# Altium PCB lps_display_rev_10.PcbDoc (part 3 of 3)
Units mil, origin at the board's own origin, x right, y up, seen from the top; angles counter-clockwise.
Board outline 5360 x 2470 mil, 2 copper layers (Top Layer, Bottom Layer), stack 6.2 mil thick; 137 components, 84 nets, 474 pads, 135 vias.
Unrouted connection lines stored in the file: 10.
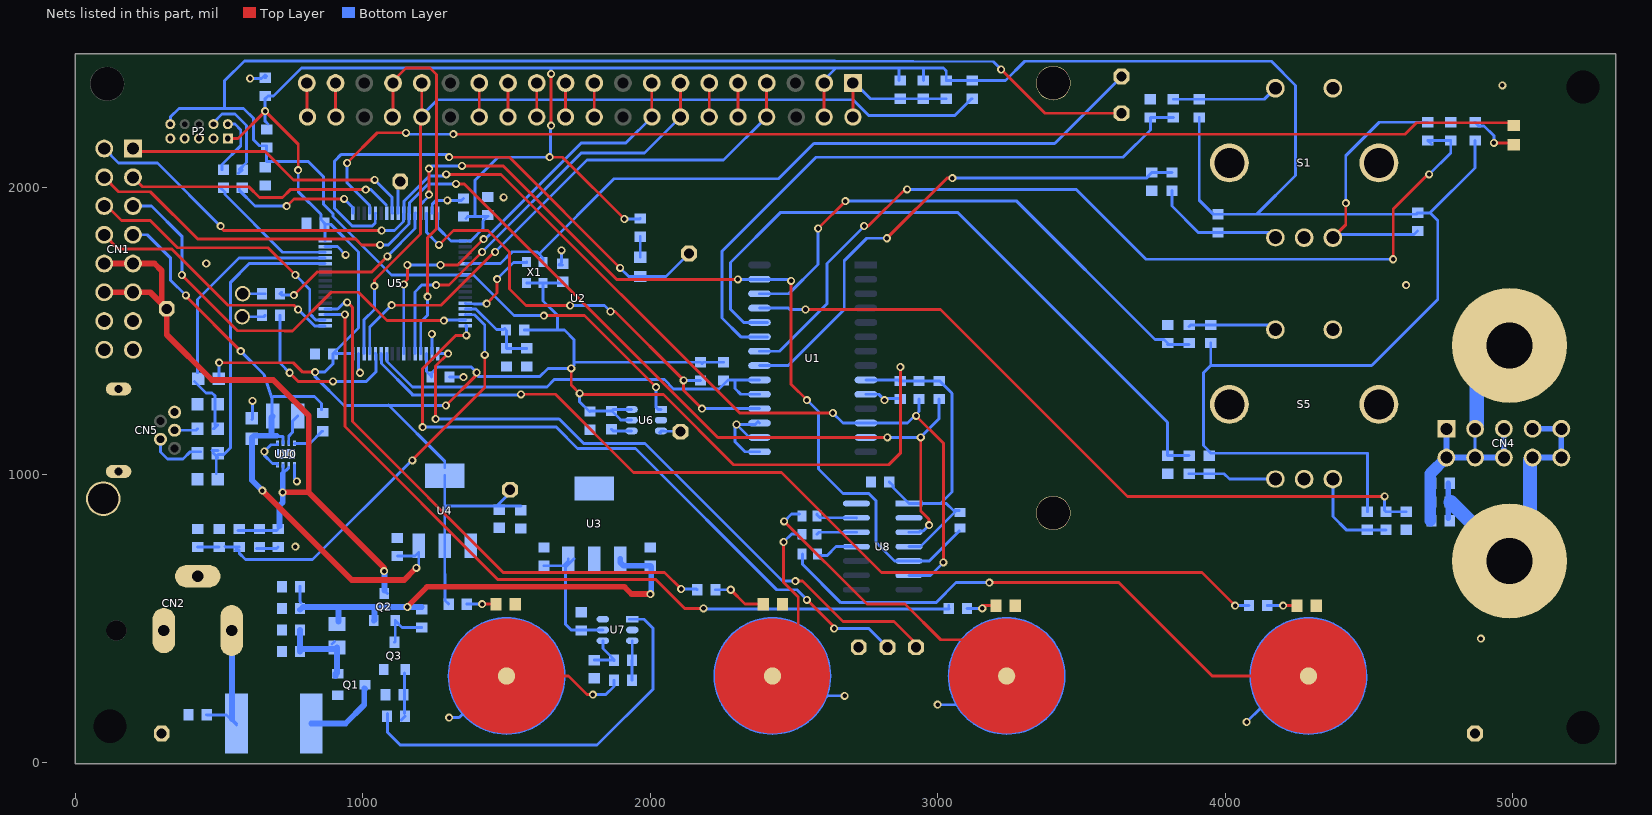
[diagram p2: the nets of this part, all layers, seen from the top]

## Part data (continued)
R26 R32: library part "RES 1K OHM 1% 1/10W 0603", "1.0K 0603", Manufacturer="Stackpole Electronics Inc.", Manufacturer Part Number=RMCF0603FT1K00, Operating Temperature="-55°C ~ 155°C", Package / Case=0603, Power (Watts)="0.1W, 1/10W", Resistance (Ohms)=330, Supplier Part Number 1=RMCF0603FT1K00CT-ND, Temperature Coefficient=±100ppm/°C, Tolerance=±1%, Category=Resistors, ComponentLink1Description=https://www.seielect.com/Catalog/SEI-RMCF_RMCP.pdf, ComponentLink1URL=https://www.seielect.com/Catalog/SEI-RMCF_RMCP.pdf, Composition="Thick Film", Failure Rate=-, Features="Automotive AEC-Q200", Height - Seated (Max)="0.022\" (0.55mm)", Packaging="Cut Tape (CT)", Part Status=Active, Pricing 1="1=0.1, 10=0.02, 100=0.0081, 1000=0.00364, 2500=0.00316 (USD)", RoHS="RoHS Compliant", Size / Dimension="0.061\" L x 0.031\" W (1.55mm x 0.80mm)", Stock 1=411308, Supplier 1=Digi-Key, Supplier Device Package=0603
R29 R30: library part "RES 100 OHM 1% 1/10W 0603 2017", "100 0603", Manufacturer="Vishay Dale", Manufacturer Part Number=CRCW0603100RFKEC, Operating Temperature="-55°C ~ 155°C", Package / Case=0603, Power (Watts)="0.1W, 1/10W", Supplier Part Number 1=541-2975-1-ND, Temperature Coefficient=±100ppm/°C, Tolerance=±1%, Category=Resistors, ComponentLink1Description=http://www.vishay.com/docs/20035/dcrcwe3.pdf, ComponentLink1URL=http://www.vishay.com/docs/20035/dcrcwe3.pdf, Composition="Thick Film", Failure Rate=-, Features="Automotive AEC-Q200", Height - Seated (Max)="0.020\" (0.50mm)", Packaging="Cut Tape (CT)", Part Status=Active, Pricing 1="1=0.1, 10=0.033, 100=0.0136, 1000=0.00609, 2500=0.00529, 5000=0.00437 (USD)", Resistance (Ohms)=100, RoHS="RoHS Compliant", Size / Dimension="0.063\" L x 0.033\" W (1.60mm x 0.85mm)", Stock 1=25979, Supplier 1=Digi-Key, Supplier Device Package=0603
R31: library part "RES 10K OHM 1/10W 1% 0603 SMD", "10K 0603", Manufacturer="Panasonic Electronic Components", Manufacturer Part Number=ERJ-3EKF1002V, Package / Case=0603, Power (Watts)="0.1W, 1/10W", Resistance (Ohms)=20k, Supplier Part Number 1=P10.0KHCT-ND, Temperature Coefficient=±100ppm/°C, Tolerance=±1%, Category=Resistors, ComponentLink1Description=http://industrial.panasonic.com/www-cgi/jvcr13pz.cgi?E+PZ+3+AOA0002+ERJ3EKF1002V+7+WW, ComponentLink1URL=http://industrial.panasonic.com/www-cgi/jvcr13pz.cgi?E+PZ+3+AOA0002+ERJ3EKF1002V+7+WW, Composition="Thick Film", Features=-, Height="0.022\" (0.55mm)", Number of Terminations=2, Packaging="Cut Tape (CT)", Pricing 1="1=0.1, 50=0.015, 100=0.0114, 250=0.00844, 500=0.00624, 1000=0.00416, 2500=0.00351 (USD)", RoHS="RoHS Compliant", Size / Dimension="0.063\" L x 0.031\" W (1.60mm x 0.80mm)", Stock 1=5046430, Supplier 1=Digi-Key, Supplier Device Package=0603
R35 R36: library part CMP-001-0711-04, "Res Thick Film 0603 22 Ohm 5% 1/10W ±100ppm/C Molded SMD Paper T/R", Max Operating Temperature=155°C, Max Power Dissipation=100mW, Min Operating Temperature=-55°C, Package (Imperial)=0603, Package (Metric)=1608, Resistance=20, Temperature Coefficient=100ppm/°C, Tolerance=5%, Height=550µm, Length=1.55mm, Mount="Surface Mount", Power=100mW, Power Rating=100mW, Termination=SMD/SMT, Width=800µm
R37: library part "RES 1K OHM 1% 1/10W 0603", "1.0K 0603", Manufacturer="Stackpole Electronics Inc.", Manufacturer Part Number=RMCF0603FT1K00, Operating Temperature="-55°C ~ 155°C", Package / Case=0603, Power (Watts)="0.1W, 1/10W", Resistance (Ohms)=1k, Supplier Part Number 1=RMCF0603FT1K00CT-ND, Temperature Coefficient=±100ppm/°C, Tolerance=±1%, Category=Resistors, ComponentLink1Description=https://www.seielect.com/Catalog/SEI-RMCF_RMCP.pdf, ComponentLink1URL=https://www.seielect.com/Catalog/SEI-RMCF_RMCP.pdf, Composition="Thick Film", Failure Rate=-, Features="Automotive AEC-Q200", Height - Seated (Max)="0.022\" (0.55mm)", Packaging="Cut Tape (CT)", Part Status=Active, Pricing 1="1=0.1, 10=0.02, 100=0.0081, 1000=0.00364, 2500=0.00316 (USD)", RoHS="RoHS Compliant", Size / Dimension="0.061\" L x 0.031\" W (1.55mm x 0.80mm)", Stock 1=411308, Supplier 1=Digi-Key, Supplier Device Package=0603
R38: library part "RES 4.7K OHM 1/10W 5% 0603 SMD", "4.7K 0603", Manufacturer="Panasonic Electronic Components", Manufacturer Part Number=ERJ-3GEYJ472V, Package / Case=0603, Power (Watts)="0.1W, 1/10W", Resistance (Ohms)=51K, Supplier Part Number 1=P4.7KGCT-ND, Temperature Coefficient=±200ppm/°C, Tolerance=±5%, Category=Resistors, ComponentLink1Description=http://industrial.panasonic.com/www-cgi/jvcr13pz.cgi?E+PZ+3+AOA0001+ERJ3GEYJ472V+7+WW, ComponentLink1URL=http://industrial.panasonic.com/www-cgi/jvcr13pz.cgi?E+PZ+3+AOA0001+ERJ3GEYJ472V+7+WW, Composition="Thick Film", Features="Automotive AEC-Q200 Qualified", Height="0.022\" (0.55mm)", Number of Terminations=2, Packaging="Cut Tape (CT)", Pricing 1="1=0.1, 50=0.0126, 100=0.0096, 250=0.00716, 500=0.00528, 1000=0.00352, 2500=0.00297 (USD)", RoHS="RoHS Compliant", Size / Dimension="0.063\" L x 0.031\" W (1.60mm x 0.80mm)", Stock 1=1261582, Supplier 1=Digi-Key, Supplier Device Package=0603
R46: library part "RES 1K OHM 1% 1/10W 0603", "1.0K 0603", Manufacturer="Stackpole Electronics Inc.", Manufacturer Part Number=RMCF0603FT1K00, Operating Temperature="-55°C ~ 155°C", Package / Case=0603, Power (Watts)="0.1W, 1/10W", Resistance (Ohms)=51k, Supplier Part Number 1=RMCF0603FT1K00CT-ND, Temperature Coefficient=±100ppm/°C, Tolerance=±1%, Category=Resistors, ComponentLink1Description=https://www.seielect.com/Catalog/SEI-RMCF_RMCP.pdf, ComponentLink1URL=https://www.seielect.com/Catalog/SEI-RMCF_RMCP.pdf, Composition="Thick Film", Failure Rate=-, Features="Automotive AEC-Q200", Height - Seated (Max)="0.022\" (0.55mm)", Packaging="Cut Tape (CT)", Part Status=Active, Pricing 1="1=0.1, 10=0.02, 100=0.0081, 1000=0.00364, 2500=0.00316 (USD)", RoHS="RoHS Compliant", Size / Dimension="0.061\" L x 0.031\" W (1.55mm x 0.80mm)", Stock 1=411308, Supplier 1=Digi-Key, Supplier Device Package=0603
R47: library part CMP-007-0337-12, "RES 1.54K OHM 1/10W 1% 0603 SMD", Package (Imperial)=0603, Package (Metric)=1608, Power=100mW, Resistance=1.5k, Temperature Coefficient=±100ppm/°C, Tolerance=1%, Height=550µm, Termination=SMD/SMT
R49: library part "RES 1K OHM 1% 1/10W 0603", "1.0K 0603", Manufacturer="Stackpole Electronics Inc.", Manufacturer Part Number=RMCF0603FT1K00, Operating Temperature="-55°C ~ 155°C", Package / Case=0603, Power (Watts)="0.1W, 1/10W", Resistance (Ohms)=1M, Supplier Part Number 1=RMCF0603FT1K00CT-ND, Temperature Coefficient=±100ppm/°C, Tolerance=±1%, Category=Resistors, ComponentLink1Description=https://www.seielect.com/Catalog/SEI-RMCF_RMCP.pdf, ComponentLink1URL=https://www.seielect.com/Catalog/SEI-RMCF_RMCP.pdf, Composition="Thick Film", Failure Rate=-, Features="Automotive AEC-Q200", Height - Seated (Max)="0.022\" (0.55mm)", Packaging="Cut Tape (CT)", Part Status=Active, Pricing 1="1=0.1, 10=0.02, 100=0.0081, 1000=0.00364, 2500=0.00316 (USD)", RoHS="RoHS Compliant", Size / Dimension="0.061\" L x 0.031\" W (1.55mm x 0.80mm)", Stock 1=411308, Supplier 1=Digi-Key, Supplier Device Package=0603
R50: library part "RES 1K OHM 1% 1/10W 0603", "1.0K 0603", Manufacturer="Stackpole Electronics Inc.", Manufacturer Part Number=RMCF0603FT1K00, Operating Temperature="-55°C ~ 155°C", Package / Case=0603, Power (Watts)="0.1W, 1/10W", Resistance (Ohms)=5.1k, Supplier Part Number 1=RMCF0603FT1K00CT-ND, Temperature Coefficient=±100ppm/°C, Tolerance=±1%, Category=Resistors, ComponentLink1Description=https://www.seielect.com/Catalog/SEI-RMCF_RMCP.pdf, ComponentLink1URL=https://www.seielect.com/Catalog/SEI-RMCF_RMCP.pdf, Composition="Thick Film", Failure Rate=-, Features="Automotive AEC-Q200", Height - Seated (Max)="0.022\" (0.55mm)", Packaging="Cut Tape (CT)", Part Status=Active, Pricing 1="1=0.1, 10=0.02, 100=0.0081, 1000=0.00364, 2500=0.00316 (USD)", RoHS="RoHS Compliant", Size / Dimension="0.061\" L x 0.031\" W (1.55mm x 0.80mm)", Stock 1=411308, Supplier 1=Digi-Key, Supplier Device Package=0603
R51 R52 R53 R54: library part CMP-001-0749-04, "ERJ3EKF5101V             SMD Chip Resistor, Thick Film, 5.1 kohm, 75 V, 0603, 100 mW,  1%, ERJ3E Series", Max Operating Temperature=155°C, Max Power Dissipation=100mW, Min Operating Temperature=-55°C, Package (Imperial)=0603, Package (Metric)=1608, Resistance=5.1k, Temperature Coefficient=100ppm/°C, Tolerance=1%, Depth=0.8mm, Height=800µm, Length=1.6mm, Mount="Surface Mount", Power=100mW, Power Rating=100mW, Termination=SMD/SMT, Width=800µm
U1: library part mcp23017, "I2C 16 bit Expander"
U3: library part R-78E5.0-0.5
U4: library part LD1117S33, "3.3 volt fixed regulator, 800mA", Supplier Part Number 1=497-1242-1-ND, Supplier 1=Digi-Key
U5: library part stm32f103rbt6, "stm32f103rbt6"
U7: "CAP QTouch Chip"
U8: "QTouch IC"
U10: library part CMP-001-1046-01, "IC REG BUCK ADJ 0.5A SYNC 8WSON", Max Input Voltage=17V, Max Operating Temperature=125°C, Max Output Current=500mA, Max Output Voltage=6V, Min Input Voltage=3V, Min Operating Temperature=-40°C, Min Output Voltage=900mV, Package Quantity=3000, Quiescent Current=17uA, Switching Frequency=2.25MHz, Contact Plating=Gold, Lead Free="Lead Free", Number of Outputs=1, Number of Pins=8, Operating Supply Voltage=17V, Output Configuration=Positive, Output Current=500mA, Output Type=Adjustable, Output Voltage=6V, Packaging="Tape and Reel", Radiation Hardening=No, REACH SVHC="No SVHC", Synchronous Rectifier=Yes
X1: library part CMP-001-1264-01, "XTAL OSC TCXO 12.0000MHZ HCMOS", Case/Package=SMD/SMT, Frequency=12MHz, Frequency Stability=2.5ppm, Max Operating Temperature=85°C, Max Supply Current=4.8mA, Min Operating Temperature=-40°C, Mount="Surface Mount", Packaging="Tape and Reel"

## Free pads (board coordinates)
  round 110 hole 115 unplated: 0(120,125) 0(5245,120) 0(5245,2350)

## Via types
v1: diameter 28, hole 16, Top Layer to Bottom Layer, 133 vias
v2: diameter 15.75, hole 7.87, Top Layer to Bottom Layer, 2 vias

## Nets (pads, with @x,y where several pads share a name; then routed paths per layer and width w, separated by ;. In a path a pad name is that pad's centre, name@x,y a point inside that pad or via, vN(x,y) a via of type N, cw(c..) or ccw(c..) an arc to the next point about the centre after c; other vN are vias at no path point)
3V3: 3V3.1 C1.1 C2.1 C3.1 C4.1 C14.1 C15.1 C19.1 C21.1 C22.1 C23.1 C24.1 C25.1 C26.1 C33.1 C43.1 FB2.1 P2.1 R5.2 R6.2 R7.2 R8.2 R9.2 R10.2 R11.2 R14.2 R15.2 R16.2 R21.2 R26.2 R31.1 R32.2 R38.2 R47.1 R48.2 R54.2 U1.9 U2.2 U4.2 U4.4 U5.1 U5.19 U5.32 U5.48 U5.64 U6.5 U6.6 U8.1 U8.4 X1.1 X1.4 | length 18290.9
  Top Layer w10: v1(500,1390) 758,1390 791,1357 v1(834,1357) ; P2.1@545,2170 565,2170 v1(660,2265) 775,2150 v1(775,2060) ; v1(1289,1241) 1396,1348 v1(1396,1356) ; v1(1650,2105) 1695,2105 v1(1910,1890) ; v1(1655,2215) v1(1655,2395) ; v1(1725,1370) 1725,1312 v1(1754,1283) 1758,1279 2046,1279 2290,1035 2830,1035 2870,1075 v1(2870,1375)
  Bottom Layer w10: R47.1@500,1334.57 v1(500,1390) ; 670,2220 660,2230 v1(660,2265) 660,2308.5 670,2318.5 689.5,2318.5 786,2415 1655,2415 ; v1(775,2060) 775,1985 853.78,1906.22 853.78,1887.72 C25.1@866.5,1875 866.5,1873.03 C25.1@867.64,1871.89 ; U5.48@868.54,1813.54 867.64,1814.45 C25.1@867.64,1871.89 ; C24.1@906.5,1420 908.31,1421.81 U5.32@965,1421.81 ; 1089.5,1242.5 1285,1047 U4.4@1285,1025 ; U5.19@1220.9,1421.81 1220.9,1359.57 C26.1@1238.5,1341.97 ; C26.1@1238.5,1340 C26.1@1238.5,1341.97 ; U5.64@1260.28,1910 1260.28,1859.72 1306.46,1813.54 U5.1@1356.73,1813.54 1359.16,1813.54 U5.1@1360,1814.38 ; 1285,655 U4.2@1285,752.95 1285,890 ; U4.4@1285,997.05 1285,890 ; 1285.79,654.21 1285.79,562.72 R21.2@1298.5,550 ; v1(1289,1241) 934,1241 834,1341 v1(834,1357) 867,1357 896.5,1386.5 C24.1@896.5,1420 896.5,1421.97 985,1510.47 985,1775 888.11,1871.89 C25.1@867.64,1871.89 ; C23.1@1358.33,1892.15 1364.37,1898.19 1390,1898.19 ; U5.1@1370,1813.75 1375.52,1813.75 1418.35,1856.58 1418.35,1882.91 C22.1@1433.62,1898.19 ; v1@1396,1346 1400.41,1341.59 1615.59,1341.59 1644,1370 v1(1725,1370) 1735,1380 1735,1391.5 ; v1(1396,1356) 1377,1375 1260,1375 1238.5,1353.5 C26.1@1238.5,1341.97 ; C22.1@1435,1899.57 C22.1@1433.62,1898.19 ; 3V3.1@1512.79,947.21 3V3.1@1512,948 1512,937.5 C15.1@1466,891.5 ; C14.1@1550,891.5 C15.1@1466,891.5 ; FB2.1@1561.5,1503.5 1677,1503.5 ; X1.1@1570,1667.52 X1.4@1627.09,1667.52 ; v1(1655,2215) 1652.5,2212.5 1652.5,2107.5 v1(1650,2105) 1470,2105 1390,2025 1390,1898.19 ; v1(1655,2395) 1655,2415 ; C19.1@1695,1671.5 1691.02,1667.52 X1.4@1627.09,1667.52 ; v1(1754,1283) 1754.03,1254 1788.03,1220 C33.1@1790,1220 1791.5,1221.5 R38.2@1865,1221.5 ; v1(1910,1890) 1963.5,1890 R26.2@1965,1891.5 ; U6.5@1935,1190 1898.35,1190 1891.28,1197.07 1891.28,1197.19 1866.97,1221.5 R38.2@1865,1221.5 ; U6.6@1935,1227.4 1870.91,1227.4 R38.2@1865,1221.5 ; R11.2@2175,1391.5 1735,1391.5 ; R11.2@2180,1386.5 2185,1391.5 R8.2@2255,1391.5 ; U2.2@2610,2365 2610,2379.14 2645.86,2415 ; U1.9@2750.08,1330 2865,1330 2865,1326.5 C1.1@2870,1326.5 R10.2@2935,1326.5 R9.2@3005,1326.5 3006.97,1326.5 3050,1283.46 3050,940 3010,900 ; C43.1@2831.5,975 2844.21,962.28 2844.21,955.79 U8.1@2900,900 3010,900 ; C4.1@2865,2371.5 2865,2415 ; C1.1@2870,1330 v1(2870,1375) ; U8.4@2900,750 2939.79,750 R54.2@3065.22,875.43 ; C2.1@2950,2371.5 2950,2415 ; R54.2@3075,875.43 R54.2@3065.22,875.43 ; R48.2@3120,2371.5 R48.2@3121.97,2371.5 ; R6.2@3910,2243.5 3910,1955 3958.5,1906.5 R7.2@3975,1906.5 4110,1906.5 ; R15.2@3950,1458.5 3950,1380 ; R14.2@4495,871.5 4495,1075 3951.5,1075 3925,1101.5 3925,1355 3950,1380 ; R32.2@4870,2163.5 4870,2067.99 4713.5,1911.5 ; 1285,890 1286.5,891.5 C15.1@1466,891.5 ; 1390,1898.19 C22.1@1433.62,1898.19 ; X1.4@1627.09,1667.52 1627.09,1604.91 1677,1555 1677,1503.5 ; 1655,2415 2645.86,2415 ; 1677,1503.5 1701.5,1503.5 1735,1470 1735,1391.5 ; 2645.86,2415 2865,2415 ; 2865,2415 2950,2415 ; 2950,2415 3020,2415 3030,2405 C3.1@3030,2371.5 R48.2@3121.97,2371.5 ; 3010,900 3030,900 3054.57,875.43 R54.2@3065.22,875.43 ; R48.2@3121.97,2371.5 3235.5,2371.5 3303,2439 4161,2439 4245,2355 4245,2041.5 4110,1906.5 ; 3950,1380 4510,1380 4740,1610 4740,1885 4713.5,1911.5 ; 4110,1906.5 4665,1906.5 R5.2@4670,1911.5 4713.5,1911.5
5V0: C10.1 C35.1 CN1.4 L1.2 R18.1 U4.3 U10.6 | length 2303.1
  Top Layer w10: v1(384,1624) 384,1621 v1(575,1430) ; v1@1180,670 v1@1190,670
  Top Layer w20: v1(650,945) 961,634 1144,634 v1@1180,670
  Bottom Layer w10: CN1.4@200,1835 250,1835 330,1755 330,1678 v1(384,1624) ; v1(575,1430) 655.69,1349.31 683.69,1265 L1.2@683.69,1201 ; L1.2@686.69,1184.12 L1.2@686.69,1204 ; 689,1272 832,1272 856,1248 R18.1@856,1226.43 ; 700.6,1136.24 697.96,1133.6 722.16,1133.6 U10.6@722.16,1109.4 ; C35.1@1120,717.01 1181.46,717.01 1194.45,730 1194.45,684.45 v1(1185.84,675.84)
  Bottom Layer w20: v1(650,945) 614,981 614,1129.5 620.74,1136.24 700.6,1136.24 ; 682,1140 682,1199.31 683.69,1201 L1.2@686.69,1204
8MH_XTAL_IN: OSC_OUT.1 U5.5 X1.3 | length 2572.1
  Bottom Layer w10: U5.5@1356.73,1734.8 1478.8,1734.8 1519.93,1775.93 1605.07,1775.93 1616.08,1764.92 ; X1.3@1627.09,1740.35 1627.09,1753.91 1616.08,1764.92 ; OSC_OUT.1@3623.5,2369.5 3407,2153 2569,2153 2446,2030 1874,2030 1616.08,1772.08 1616.08,1764.92
+VIN: C8.1 C9.1 C34.1 FB1.2 Q2.2 R1.2 U3.1 | length 1699.6
  Top Layer w20: v1(1155,540) 1155,542.16 1222.84,610 1910,610 1935,585 v1(2000,585)
  Bottom Layer w10: C9.1@781.5,611.97 C9.1@781.5,610 781.5,558.5 785,555
  Bottom Layer w20: C8.1@781.5,530 791.5,540 915,540 ; FB1.2@915,489.92 915,540 ; Q2.2@1037.6,492.76 1040,495.16 1040,540 ; R1.2@1205,540 v1(1155,540) 1140,540 ; U3.1@1895.55,707.95 1895.55,695.16 1907.2,683.5 C34.1@2000,683.5 2003.47,680.03 2003.47,588.47 v1(2000,585) ; 915,540 1040,540 ; 1040,540 1135,540 ; 1135,540 1140,540 ; 1135,540 1140,541 1140,540
+VIN_SW: +VIN_SW.1 C12.1 C13.1 CN1.5 CN1.6 CN1.13 CN1.14 Q2.3 R23.2 U10.2 U10.3 | length 2463.4
  Top Layer w20: CN1.14@100,1635 CN1.6@200,1635 260,1635 +VIN_SW.1@300,1595 ; CN1.13@100,1735 CN1.5@200,1735 275,1735 300,1710 +VIN_SW.1@300,1595 ; +VIN_SW.1@311,1584 +VIN_SW.1@300,1595 ; +VIN_SW.1@317.5,1577.5 317.5,1487.5 475,1330 688,1330 812,1206 812,939 811,939 ; v1(721,939) 811,939 ; v1(1074,665) 1074,676 811,939
  Bottom Layer w10: R23.2@565,806.5 700,806.5 C12.1@705,811.5 ; 721,1003.93 722.16,1005.09 ; U10.3@722.16,1034.6 722.16,1005.09 ; U10.2@741.84,1024.77 722.16,1005.09 ; Q2.3@1080,592.24 Q2.3@1085,587.24
  Bottom Layer w20: C12.1@710,820.5 710,893 721,904 v1(721,939) 721,1003.93 ; Q2.3@1075.31,597.24 v1@1075.31,665
/CAP_T_INT: R54.1 U1.27 U5.61 U8.5 | length 3026.5
  Top Layer w10: v1(1230,1975) v1(1230,2065) ; v1(1345,2075) 1488,2075 1883,1680 v1(2305,1680) ; v1(2490,1675) 2490,1315 v1(2545,1260)
  Bottom Layer w10: U5.61@1201.22,1910 1201.22,1941.17 1222.67,1962.62 ; v1(1230,2065) 1240,2075 v1(1345,2075) ; v1(2305,1680) U1.27@2380,1680 2485,1680 v1(2490,1675) ; v1(2545,1260) 2585,1220 2585,1020 2670,935 2760,935 2785.95,909.05 2785.95,764.05 2850,700 U8.5@2900,700 2970.43,700 R54.1@3075,804.57
/INT: R8.1 U1.19 U1.20 U5.26 | length 1520.5
  Bottom Layer w10: U5.26@1083.11,1421.81 1084.02,1420.91 1084.02,1394.09 1172.11,1306 1641,1306 1666,1331 2049,1331 2081.21,1298.79 2238.79,1298.79 2270,1330 2295,1330 ; U1.19@2380,1280 2315,1280 2295,1300 2295,1330 ; U1.20@2380,1330 2295,1330
/RST_MCP23017: R11.1 U1.18 U5.62 | length 1676.2
  Top Layer w10: v1(1265,1800) 1315,1850 1435,1850 1510,1775 1510,1646 1567,1589 v1(1721,1589) ; v1(1861.5,1568) 1877,1568 v1(2116.19,1328.81) 2116.19,1293.81 v1(2180,1230)
  Bottom Layer w10: U5.62@1220.9,1910 1220.9,1844.09 v1(1265,1800) ; v1(1721,1589) 1840.5,1589 v1(1861.5,1568) ; v1@2115.88,1329.12 v1(2116.19,1328.81) 2116.5,1328.5 R11.1@2175,1328.5 ; v1(2180,1230) U1.18@2380,1230
/RST_OLED: R48.1 U2.16 U5.30 | length 2906.1
  Top Layer w10: v1(1040,1656.25) 1040,1678.23 1200,1838.23 1200,2240 U2.16@1205,2244.99 U2.16@1205,2255
  Bottom Layer w10: U5.30@1004.37,1421.81 1004.37,1539.37 1040,1575 v1(1040,1656.25) ; U2.16@1205,2244.99 1205,2250 1260,2305 2705,2305 2760,2250 3059.53,2250 3118.03,2308.5 R48.1@3120,2308.5
Current_Limit: CN1.11 U5.34 | length 982.8
  Top Layer w10: CN1.11@100,1935 110,1935 160,1885 260,1885 355,1790 670,1790 v1(765,1695)
  Bottom Layer w10: v1(765,1695) 815,1645 815,1560 837.05,1537.95 U5.34@868.54,1537.95
D/C_OLED: U2.4 U5.29 | length 1776
  Top Layer w10: v1(1100,1590) 1272.02,1590 1457.02,1775 v1(1460,1775)
  Bottom Layer w10: U5.29@1024.06,1421.81 1024.06,1514.05 v1(1100,1590) ; v1(1460,1775) 1780,2095 2255,2095 U2.4@2405,2244.99
DEBUG_LED: LED2.2 T2.1 U5.53 | length 1823.4
  Top Layer w10: v1(1300,2105) 1510,2105 v1(1895,1720)
  Bottom Layer w10: U5.53@1043.74,1910 1042.83,1909.09 1042.83,1875.86 1031.98,1865 963.5,1865 901,1927.5 901,2091 925,2115 1290,2115 v1(1300,2105) ; v1(1895,1720) 1925,1690 LED2.2@1965,1690 2055,1690 T2.1@2135,1770
GND: C1.2 C2.2 C3.2 C4.2 C7.2 C8.2 C9.2 C10.2 C11.2 C12.2 C13.2 C14.2 C15.2 C16.2 C17.2 C18.2 C19.2 C21.2 C22.2 C23.2 C24.2 C25.2 C26.2 C27.2 C28.2 C29.2 C30.2 C31.2 C32.2 C33.2 C34.2 C35.2 C36.2 C37.2 C39.2 C40.2 C41.2 C43.2 CN1.7 CN1.8 CN1.15 CN1.16 CN2.2 CN2.3 CN5.0 CN5.5 CS1.2 CS2.2 CS3.2 CS4.2 GND1.1 GND2.1 GND3.1 LED1.2 LED4.2 LED5.2 LED6.2 P2.3 P2.5 P2.7 P2.9 Q1.1 Q3.2 R12.2 R37.1 R46.1 R49.1 S1.2 S1.4 S1.5 S1.7 S5.2 S5.4 S5.5 S5.7 U1.10 U1.15 U1.16 U1.17 U2.1 U2.5 U2.6 U2.10 U2.11 U2.12 U2.13 U2.14 U2.19 U2.20 U3.2 U3.4 U4.1 U5.12 U5.18 U5.31 U5.47 U5.63 U6.2 U7.2 U7.6 U8.2 U8.14 U10.1 U10.4 U10.5 U10.9 X1.2 | length 2780.2
  Top Layer w10: v1(1430.77,1595.23) 1430.77,1595.77 1467,1632 v1(1467,1681)
  Bottom Layer w10: v1(608,2379) 647.5,2379 660,2391.5 665,2386.5 C21.2@660,2381.5 ; C10.2@614,1192.5 616,1194.5 v1(616,1257) ; C13.2@630,743.5 700,743.5 C12.2@705,748.5 ; U10.4@702.47,1034.6 702.47,1039.36 685.64,1039.36 657,1068 v1(657,1081) 680.64,1104.64 702.47,1104.64 U10.5@702.47,1109.4 ; U10.1@761.53,1034.6 761.53,985.47 v1(770,977) ; U5.47@868.54,1793.86 911.14,1793.86 v1(940,1765) ; U5.31@984.68,1421.81 984.68,1360.32 v1(990,1355) ; v1(1240,1490) 1240.59,1489.41 U5.18@1240.59,1421.81 ; U5.63@1240.59,1910 1241.5,1910.91 1241.5,1941.5 1255,1955 v1(1294,1955) 1343.5,1955 C23.2@1350,1961.5 ; v1(1300,155) 1335,155 1380,200 1450,200 1500,200 1550,200 1600,200 1650,200 ; C26.2@1301.5,1340 v1(1350,1340) ; U5.12@1356.73,1597.01 1358.51,1595.23 1385.32,1595.23 1386.23,1594.32 1429.87,1594.32 v1(1430.77,1595.23) ; v1(1467,1681) 1524.39,1738.39 1570,1738.39 X1.2@1570,1740.35 ; 1600,300 1650,300 1700,300 ; v1(1691,1781) 1691,1739.12 1682.44,1730.56 C19.2@1695,1730.56 ; v1@2295,1170 2295,1115 2330,1080 U1.15@2380,1080 ; U1.16@2380,1130 2345,1130 v1(2300,1175) 2365,1175 2375,1185 U1.17@2380,1180 ; 2610,225 2610.68,225.68 2616,231 v1(2676,231) v1@2680,235 ; U2.1@2710,2365 2766.5,2308.5 C4.2@2870,2308.5 C2.2@2950,2308.5 C3.2@3030,2308.5 ; U1.10@2750.08,1280 2795,1280 v1(2815,1260) 2820,1265 C1.2@2865,1265 ; v1(3000,200) 3066.79,200 3070,200 3090,200 ; v1(4075,140) 4123.78,188.78 4135,200 4140,200 4190,200
  other v1: 4890,430 765,750 4630,1660 455,1735 1490,1965 4965,2355
  other v2: 716.25,1071.02 747.75,1071.02
I2C_SCL: CN1.9 R10.1 U1.12 U5.58 U8.6 | length 4199.5
  Top Layer w10: CN1.9@100,2120.93 CN1.9@100,2135 ; v1@500,1865 515,1850 v1(1065,1850) ; v1(1290,2045) 1481,2045 2311,1215 v1(2635,1215) ; v1(2925,1205) 3020,1110 v1(3020,695)
  Bottom Layer w10: CN1.9@100,2135 150,2085 285,2085 v1(505,1865) ; v1(1065,1850) 1110,1850 1141.26,1881.26 1141.26,1909.09 U5.58@1142.16,1910 1143.07,1910.91 1143.07,1951.86 1230.21,2039 1284,2039 v1(1290,2045) ; v1(2635,1215) 2670,1180 U1.12@2750.08,1180 2895,1180 2935,1220 R10.1@2935,1263.5 ; U8.6@2900,650 2975,650 v1(3020,695)
I2C_SDA: CN1.10 R9.1 U1.13 U5.59 U8.3 | length 4066.7
  Top Layer w10: CN1.10@100,2035 150,1985 260,1985 424,1821 974,1821 995,1800 v1(1060,1800) ; v1(1324,2012) 1353,2012 2235,1130 v1(2825,1130) ; v1(2941,1130) 2941,874 2970,845 v1(2970,825)
  Bottom Layer w10: v1(1060,1800) 1088.45,1800 1160.94,1872.5 1160.94,1909.09 1162.76,1910.91 1162.76,1947.5 1227.25,2012 v1(1324,2012) ; U1.13@2750.08,1130 v1(2825,1130) v1(2941,1130) 2941,1131 3005,1195 R9.1@3005,1263.5 ; U8.3@2900,800 2934.54,800 2939.02,804.47 2949.47,804.47 v1(2970,825)
I_ENC_A: C31.1 R27.2 U1.24 | length 2396.4
  Bottom Layer w10: U1.24@2407.56,1530 U1.24@2380,1530 2325,1530 2279,1576 2279,1739 2452,1912 3070.5,1912 3800,1182.5 C31.1@3800,1066.5 R27.2@3875,1066.5
I_ENC_B: C27.1 R28.2 U1.25 | length 2616.9
  Top Layer w10: v1(2540,1575) 3010,1575 3660,925 v1(4555,925)
  Bottom Layer w10: U1.25@2380,1580 2480,1580 2485,1575 v1(2540,1575) 2495,1575 ; v1(4555,925) 4555,876.5 R28.2@4560,871.5 C27.1@4630,871.5
I_ENC_SW: C39.1 R45.1 U1.26 | length 1905.9
  Top Layer w10: v1(2584,1857) v1(2679,1952)
  Bottom Layer w10: U1.26@2380,1630 2481.77,1630 2584,1732.23 v1(2584,1857) ; v1(2679,1952) 3275.08,1952 3755.86,1471.22 3787.28,1471.22 C39.1@3800,1458.5 ; C39.1@3800,1453.5 R45.1@3875,1453.5
I_Sample: CN1.3 U5.15 | length 1515.4
  Top Layer w10: v1(370,1695) 564,1501 725.77,1501 726.77,1500 755,1500 890,1635 985,1635 1083.52,1536.48 v1(1281.48,1536.48)
  Bottom Layer w10: CN1.3@200,1935 265,1935 370,1830 v1(370,1695) ; v1@1280,1535 v1(1281.48,1536.48) 1282.95,1537.95 U5.15@1356.73,1537.95
MEM1_LED: R3.1 U5.35 | length 2836.5
  Top Layer w10: v1(937.36,1557.64) 937.36,1167.64 1470,635 2020,635 2120,535 v1(2185,535)
  Bottom Layer w10: U5.35@868.54,1557.64 v1(937.36,1557.64) ; v1(2185,535) 2186.69,533.31 3038.5,533.31 R3.1@3038.5,545 ; R3.1@3038.5,535 R3.1@3040,533.5
MEM2_LED: R4.1 U5.36 | length 1951.6
  Top Layer w10: v1(945,1600) 946.01,1600 963.36,1582.65 963.36,1184.87 1488.23,660 2050,660 v1(2107.5,602.5)
  Bottom Layer w10: U5.36@868.54,1577.32 912.32,1577.32 935,1600 v1(945,1600) ; v1(2107.5,602.5) 2161,602.5 R4.1@2163.5,600
Net1_1: 1.1 U5.57 | length 78.8
  Bottom Layer w10: 1121.57,1988.43 1121.57,1910.91 U5.57@1122.48,1910
Net/MR_1: /MR.1 U6.3 | length 75.7
  Bottom Layer w10: U6.3@2032.4,1147.6 U6.3@2035,1145 ; U6.3@2037.36,1152.6 2047.4,1152.6 2048.7,1151.3 2103.7,1151.3 /MR.1@2105,1150 ; /MR.1@2105,1170 /MR.1@2107.36,1172.36
NetBOOT1_1: BOOT1.1 R25.1 | length 78.5
  Bottom Layer w10: BOOT1.1@581.5,1630 R25.1@660,1630
NetBOOT2_1: BOOT2.1 R34.2 | length 75.6
  Bottom Layer w10: BOOT2.1@586.5,1550 655,1550 R34.2@660,1555
NetC5_1: C5.1 C6.1 CN4.1 CN4.2 CN4.3 CN4.6 CN4.7 CN4.8 J2.1 R17.2 | length 1303.7
  Bottom Layer w10: CN4.7@4870,1060 CN4.2@4870,1160 ; J2.1@4875,1370 5050,1545 5090,1545 J2.1@5035,1490
  Bottom Layer w20: CN4.1@4770,1160 CN4.6@4770,1060 CN4.7@4870,1060 CN4.8@4970,1060 CN4.3@4970,1160
  Bottom Layer w40: R17.2@4713.5,840 4713.5,970 4713.5,1003.5 CN4.6@4770,1060
  Bottom Layer w50: CN4.2@4875,1175 J2.1@4875,1370
NetC5_2: C5.2 C6.2 CN4.4 CN4.5 CN4.9 CN4.10 J1.1 R17.1 | length 1111.1
  Bottom Layer w10: C5.2@4776.5,905 C5.2@4785,905 ; J1.1@4990,700 J1.1@5061,771 ; CN4.9@5061,1051 CN4.9@5070,1060
  Bottom Layer w20: R17.1@4776.5,848.5 C5.2@4776.5,903.03 ; C5.2@4776.5,905 C6.2@4776.5,970 ; CN4.9@5070,1060 CN4.10@5170,1060 CN4.5@5170,1160 CN4.4@5070,1160
  Bottom Layer w50: C5.2@4785,905 J1.1@4990,700 ; J1.1@5061,771 CN4.9@5061,1051
NetC7_1: C7.1 C11.1 FB1.1 Q1.2 | length 297.6
  Bottom Layer w10: FB1.1@892.58,411.16 FB1.1@900.71,419.29 ; Q1.2@910,310.16 Q1.2@912.76,307.4
  Bottom Layer w20: C7.1@781.5,385 C11.1@781.5,460 ; C7.1@790.38,393.89 FB1.1@901.64,393.89 ; Q1.2@905,300 Q1.2@905,307.4 ; Q1.2@910,310.16 FB1.1@910,398.66
NetC16_1: C16.1 C41.1 U3.3 U7.5 | length 477.6
  Bottom Layer w10: C16.1@1630,683.5 1697.8,683.5 1714.45,700.16 U3.3@1714.45,707.95 ; U3.3@1734.45,707.95 1705,678.5 1705,480 1725,460 U7.5@1835,460
NetC17_1: C17.1 C18.1 FB2.2 U5.13 | length 302.9
  Bottom Layer w10: U5.13@1356.73,1577.32 1392.68,1577.32 1465,1505 FB2.2@1488.5,1505 ; FB2.2@1493.5,1508.5 FB2.2@1498.5,1503.5 1500,1502.01 C17.1@1500,1440 C18.1@1570,1440
NetC42_1: C42.1 R49.2 U7.4 | length 154.8
  Bottom Layer w10: R49.2@1805,355 1871.54,355 1873.5,353.03 C42.1@1873.5,355 1873.5,356.97 1835,395.47 U7.4@1835,422.6
NetC42_2: C42.2 R50.2 U7.3 | length 138
  Bottom Layer w10: R50.2@1936.5,285 C42.2@1936.5,355 1937.36,355.87 U7.3@1937.36,422.6
NetCN2_1: CN2.1 F1.1 R46.2 | length 444.3
  Bottom Layer w10: R46.2@456.5,165 457.13,164.37 525.71,164.37 F1.1@560.08,130 ; F1.1@545,150.08 F1.1@560.08,135
  Bottom Layer w20: F1.1@545,150.08 CN2.1@545,455
NetCN5_2: CN5.2 R35.1 | length 203.9
  Bottom Layer w10: CN5.2@295.67,1123.5 295.67,1079.33 320,1055 374.57,1055 399.57,1080 R35.1@435,1080
NetCN5_3: CN5.3 R36.1 | length 81.8
  Bottom Layer w10: CN5.3@344.88,1155 419.57,1155 R36.1@424.57,1160
NetCS1_1: CS1.1 R50.1 | length 433.7
  Top Layer w10: CS1.1@1500,300 1600,300 1715,300 1780,235 v1(1800,235)
  Bottom Layer w10: v1(1800,235) 1845,235 1873.5,263.5 R50.1@1873.5,285
NetCS2_1: CS2.1 R51.2 | length 954.6
  Top Layer w10: v1(2466,838) 2754,550 2886.77,550 3010.88,425.88 3092.61,425.88 3159.36,359.14
  Bottom Layer w10: v1(2466,838) 2491,863 R51.2@2518.57,863
NetCS3_1: CS3.1 R52.2 | length 562.9
  Top Layer w10: v1(2464,766) 2464,626 2515,575 2515,310 2525,300
  Bottom Layer w10: v1(2464,766) 2492,794 2515,794 R52.2@2515,785
NetCS4_1: CS4.1 R53.2 | length 2014.9
  Top Layer w10: v1(3180,625) 3630,625 3955,300 4190,300 CS4.1@4290,300
  Bottom Layer w10: R53.2@2529.43,724 2529.43,688.57 2663,555 2994.13,555 3064.13,625 v1(3180,625)
NetF1_2: F1.2 Q1.3 | length 272.4
  Bottom Layer w20: F1.2@819.92,135 940,135 1005,200 1005,257.24 Q1.3@1007.24,255
NetL1_1: L1.1 U10.7 | length 107.6
  Bottom Layer w10: U10.7@741.84,1109.4 741.92,1109.48 741.92,1134.24 754.49,1146.81 754.49,1185.18 L1.1@773.31,1204
NetLED1_1: LED1.1 R21.1 | length 103.5
  Top Layer w10: v1(1415,550) LED1.1@1463.07,550 LED1.1@1463.07,551.97
  Bottom Layer w10: R21.1@1361.5,550 v1(1415,550)
NetLED2_1: LED2.1 R26.1 | length 71.6
  Bottom Layer w10: LED2.1@1965,1756.93 R26.1@1965,1828.5
NetLED3_1: LED3.1 R32.1 | length 182.1
  Top Layer w10: v1(4935,2155) 4998.07,2155 LED3.1@5005,2148.07
  Bottom Layer w10: R32.1@4870,2226.5 4882.72,2213.78 4901.22,2213.78 4935,2180 v1(4935,2155)
NetLED4_1: LED4.1 R3.2 | length 101.6
  Top Layer w10: v1@3155,545 LED4.1@3203.07,545
  Bottom Layer w10: R3.2@3101.5,535 v1(3155,535)
NetLED5_1: LED5.1 R4.2 | length 187.3
  Top Layer w10: v1(2280,600) 2330,550 LED5.1@2393.07,550
  Bottom Layer w10: R4.2@2226.5,600 v1(2280,600)
NetLED6_1: LED6.1 R13.2 | length 101.6
  Top Layer w10: v1(4201.93,545) LED6.1@4250,545
  Bottom Layer w10: R13.2@4146.5,545 v1@4200,545
NetP2_2: P2.2 R30.1 | length 218.7
  Bottom Layer w10: R30.1@510,2061.5 510,2080 575,2145 575,2200 555,2220 P2.2@530,2220
NetP2_4: P2.4 R29.1 | length 331
  Bottom Layer w10: P2.4@477.5,2222.5 510,2255 555,2255 595,2215 595,2086.5 R29.1@570,2061.5 ; R29.1@567.5,2049 R29.1@580,2061.5 R29.1@578.03,2061.5
NetQ2_1: Q2.1 Q3.3 R1.1 | length 179.2
  Bottom Layer w10: Q3.3@1110,417.24 1112.4,419.65 Q2.1@1112.4,492.76 1136.65,468.5 R1.1@1205,468.5
NetQ3_1: Q3.1 R2.1 R12.1 | length 158
  Bottom Layer w10: R2.1@1133.78,147.28 R2.1@1146.5,160 ; R2.1@1145,170 1145,235 Q3.1@1145,310
NetR2_2: R2.2 U7.1 | length 1395.3
  Bottom Layer w10: R2.2@1085,170 1085,105 1130,60 1815,60 2010,255 2010,465 1977.6,497.4 U7.1@1937.36,497.4 U7.1@1927.52,497.4
NetR5_1: R5.1 R43.1 S1.3 | length 941.6
  Top Layer w10: S1.3@4375,1825 4420,1870 v1(4420,1945)
  Bottom Layer w10: S1.3@4375,1825 4389.88,1825 4400.67,1835.79 4657.28,1835.79 R5.1@4670,1848.5 ; v1(4420,1945) 4420,2110 4536.5,2226.5 R43.1@4705,2226.5
NetR6_1: R6.1 R42.2 S1.6 | length 370.9
  Bottom Layer w10: R42.2@3820,2306.5 R6.1@3910,2306.5 4136.5,2306.5 S1.6@4175,2345
NetR7_1: R7.1 R41.1 S1.1 | length 459.1
  Bottom Layer w10: R41.1@3815,1988.5 3815,1935 3906.5,1843.5 R7.1@3975,1843.5 4156.5,1843.5 S1.1@4175,1825
NetR14_1: R14.1 R28.1 S5.3 | length 334.3
  Bottom Layer w10: S5.3@4375,985 4375,855 4421.5,808.5 R14.1@4495,808.5 R28.1@4560,808.5
NetR15_1: R15.1 R45.2 S5.6 | length 308.9
  Bottom Layer w10: R45.2@3875,1516.5 3880,1521.5 R15.1@3950,1521.5 4158.5,1521.5 S5.6@4175,1505
NetR16_1: R16.1 R27.1 S5.1 | length 307.7
  Bottom Layer w10: R27.1@3875,1003.5 R16.1@3945,1003.5 3996.5,1003.5 4015,985 S5.1@4175,985
NetR18_2: R18.2 U10.8 | length 115.9
  Bottom Layer w10: U10.8@761.53,1109.4 815.93,1109.4 858.03,1151.5 R18.2@860,1151.5
NetR25_2: R25.2 U5.60 | length 629.8
  Top Layer w10: v1(760,1625) 840,1705 1030,1705 v1(1085,1760)
  Bottom Layer w10: R25.2@716.5,1635 R25.2@711.5,1630 716.5,1625 v1(760,1625) ; v1(1085,1760) 1181.54,1856.53 U5.60@1181.54,1910 U5.60@1182.44,1910.91
NetR34_1: R34.1 U5.28 | length 606
  Top Layer w10: v1(745,1355) 775,1325 v1(896,1325)
  Bottom Layer w10: R34.1@711.5,1555 711.5,1388.5 v1(745,1355) ; v1(896,1325) 1012,1325 1045.52,1358.52 1045.52,1420.03 U5.28@1043.74,1421.81 U5.28@1042.83,1422.72
NetR38_1: R38.1 U6.4 | length 72.4
  Bottom Layer w10: R38.1@1865,1158.5 1870.91,1152.6 U6.4@1935,1152.6
NetR51_1: R51.1 U8.13 | length 144
  Bottom Layer w10: R51.1@2580.57,864 2580.57,861.05 2591.32,850.3 2716.71,850.3 U8.13@2717.01,850
NetR52_1: R52.1 U8.12 | length 139.3
  Bottom Layer w10: R52.1@2580.57,793 2587.57,800 U8.12@2717.01,800
NetR53_1: R53.1 U8.11 | length 139
  Bottom Layer w10: R53.1@2590.57,719.57 2615.57,719.57 2646,750 U8.11@2717.01,750
NRST: C28.1 P2.10 R31.2 U5.7 U6.1 UP_RST.1 | length 5677.2
  Top Layer w10: v1(1630,1554) 1771,1554 v1(2020,1305) ; v1(3221,2410) 3373,2258 UP_RST.1@3640,2258
  Bottom Layer w10: P2.10@330,2220 330,2245 360,2275 519,2275 ; v1(1630,1554) 1526,1554 1385.35,1694.65 1357.52,1694.65 U5.7@1356.73,1695.43 1099.57,1695.43 896.21,1898.79 896.21,1908.25 863,1941.46 863,2037 810,2090 665,2090 R31.2@665,2138.5 665,2145 640,2145 620,2165 620,2240 585,2275 519,2275 ; v1(2020,1305) 2020,1234.92 2027.52,1227.4 U6.1@2037.36,1227.4 ; v1(3221,2410) 3194,2437 2641.82,2440 588,2440 519,2371 519,2275
OC_LED: LED3.2 U5.52 | length 4314.3
  Top Layer w10: v1(945,2085) 1050,2190 v1(1150,2190) ; v1(1315,2185) 4625.86,2185 4665.86,2225 LED3.2@4995,2225
  Bottom Layer w10: v1(945,2085) 945,2015.87 1024.06,1936.81 U5.52@1024.06,1910 ; v1(1150,2190) 1155,2185 v1@1309.4,2185
OUTPUT_ENB: CN1.12 U5.33 | length 899.7
  Top Layer w10: CN1.12@100,1835 150,1785 335.96,1785 530.96,1590 760,1590 v1(775,1575)
  Bottom Layer w10: v1(775,1575) 775.21,1575 831.94,1518.27 U5.33@868.54,1518.27
OUTPUT_LED: R13.1 U5.27 | length 3403.7
  Top Layer w10: v1(1550,1280) 1670,1280 1942,1008 2457,1008 2805,660 3920,660 v1(4035,545)
  Bottom Layer w10: U5.27@1063.42,1421.81 1064.33,1420.91 1064.33,1387.44 1171.77,1280 ; 1171.77,1278 1548,1278 v1(1550,1280) ; v1(4035,545) R13.1@4083.5,545
Spare1: CN1.2 U5.55 | length 943.6
  Top Layer w10: CN1.2@200,2035 233,2002 603,2002 640,1965 720,1965 747,1992 v1(1010,1992)
  Bottom Layer w10: v1(1010,1992) 1027.92,1992 1081.33,1938.59
Spare2: CN1.1 U5.56 | length 1027.7
  Top Layer w10: CN1.1@200,2135 210,2125 660,2125 759,2026 v1(1041,2026)
  Bottom Layer w10: v1(1041,2026) 1101.89,1965.11 1101.89,1910.91 U5.56@1102.8,1910
SPI_MOSI_1: U2.8 U5.23 | length 1381.8
  Top Layer w10: v1(1142.16,1662.16) 1142.16,1667.04 1155,1679.87 v1(1155,1730) ; v1@1270,1720 1280,1730 1330,1730 v1(1420,1820)
  Bottom Layer w10: U5.23@1142.16,1421.81 v1(1142.16,1662.16) ; v1(1155,1730) v1(1270,1730) ; v1(1420,1820) 1425.96,1820 1760.96,2155 1915.79,2155 U2.8@2005.79,2244.99
SPI_NSS_1: U2.17 U5.20 | length 1179.1
  Top Layer w10: U2.17@1105,2363.1 1105,2370 1150,2415 1233.25,2415 1256,2392.25 1256,1856 1225,1825 v1(1225,1620)
  Bottom Layer w10: U5.20@1201.22,1421.81 1201.22,1531.22 1225,1555 v1(1225,1620)
SPI_SCK_1: U2.7 U5.21 | length 1380.2
  Top Layer w10: v1@1265,1660 1300,1660 v1(1415,1775)
  Bottom Layer w10: U5.21@1181.54,1421.81 1181.54,1636.53 1205,1660 v1(1255,1660) ; v1(1415,1775) 1760,2120 1980,2120 U2.7@2105,2244.99
TCK/SWDCLK: R29.2 U5.49 | length 469.1
  Top Layer w10: v1(735,1935) 760,1960 v1(935,1960)
  Bottom Layer w10: R29.2@570,1998.5 570,1990 625,1935 v1(735,1935) ; v1(935,1960) 965,1930 U5.49@965,1910
TMS/SWDIO: R30.2 U5.46 | length 461.4
  Bottom Layer w10: R30.2@505,1998.5 520,1983.5 520,1975 720.83,1774.17 U5.46@868.54,1774.17
UART_RX_2: U5.17 UART_RX.1 | length 2295.5
  Top Layer w10: v1(1253,1194) 1253,1378 v1(1296.81,1421.81) ; v1(2505,630) 2530,630 2670,490 2848,490 2925,413 UART_RX.1@2925,400
  Bottom Layer w10: v1(1253,1194) 1683,1194 1768.18,1108.82 1981.18,1108.82 2460,630 v1(2505,630) ; U5.17@1260.28,1421.81 v1(1296.81,1421.81) v1@1300,1425
UART_TX_2: U5.16 UART_TX.1 | length 2378.9
  Top Layer w10: v1(1208,1166) 1208,1369.77 1323.23,1485 v1(1360,1485) ; v1(2545,565) 2640,470 v1(2640,465)
  Bottom Layer w10: v1(1208,1166) 1673,1166 1747.18,1091.82 1948.18,1091.82 2440,600 2510,600 v1(2545,565) ; U5.16@1356.73,1518.27 1358.51,1520.05 1360,1518.56 v1(1360,1485) ; v1(2640,465) 2760,465 UART_TX.1@2825,400
USBDM: C30.1 R35.2 U5.44 | length 1082.2
  Bottom Layer w10: R35.2@475,1085 R35.2@495.43,1085 ; R35.2@480.43,1075 R35.2@495,1060.43 ; C30.1@490,1004.57 R35.2@490,1060.43 ; R35.2@495.43,1070 515,1070 540,1095 540,1670 604.8,1734.8 U5.44@868.54,1734.8
USBDP: C29.1 R36.2 R47.2 U5.45 | length 970.4
  Bottom Layer w10: R47.2@414.57,1325 454.64,1284.93 475.07,1284.93 485,1275 R36.2@485,1174.13 ; R47.2@425,1355 425,1610 569.49,1754.49 U5.45@868.54,1754.49 ; R36.2@480.87,1160 R36.2@495,1174.13
V_ENC_A: C37.1 R41.2 U1.21 | length 1812.7
  Top Layer w10: v1(2823,1823) 3032,2032 v1(3051,2032)
  Bottom Layer w10: U1.21@2380,1380 2480,1380 2675,1575 2675,1745 2753,1823 v1(2823,1823) ; v1(3051,2032) 3725.5,2032 C37.1@3745,2051.5 R41.2@3815,2051.5
V_ENC_B: C36.1 R43.2 U1.22 | length 3220.5
  Top Layer w10: v1(2744,1865.5) 2758.5,1865.5 2886,1993 v1(2894,1993) ; v1(4585,1750) 4585,1925 4702.5,2042.5 v1@4712.5,2042.5
  Bottom Layer w10: U1.22@2380,1430 2450,1430 2615,1595 2615,1735 2744,1864 v1(2744,1865.5) ; v1(2894,1993) 3482,1993 3725,1750 v1(4585,1750) ; v1(4710,2045) 4785,2120 C36.1@4785,2163.5 R43.2@4705,2163.5 R43.2@4717.72,2150.79
V_ENC_SW: C40.1 R42.1 U1.23 | length 2205.8
  Bottom Layer w10: U1.23@2407.56,1480 U1.23@2380,1480 2315,1480 2250,1545 2250,1778 2577,2105 3645,2105 3740,2200 C40.1@3740,2243.5 R42.1@3820,2243.5
VIN_CHK: C32.1 R23.1 R37.2 U5.14 | length 1570.1
  Top Layer w10: v1(1172,1050) 1172,1052 1424,1304 v1(1424,1417)
  Bottom Layer w10: C32.1@425,748.5 R37.2@500,748.5 ; 520,750 521.5,748.5 R23.1@555,748.5 ; R23.1@556.52,736.99 570,736.99 570,727 592,705 825,705 1170,1050 v1(1172,1050) ; R23.1@561.52,741.99 R23.1@555,748.5 ; R23.1@570,748.5 R23.1@555,748.5 ; U5.14@1356.73,1557.64 1357.64,1556.73 1388.27,1556.73 1424,1521 v1(1424,1417)
pads on no net: CN2.0 CN5.1 CN5.4 P2.6 P2.8 U1.1 U1.2 U1.3 U1.4 U1.5 U1.6 U1.7 U1.8 U1.11 U1.14 U1.28 U2.0 U2.3 U2.9 U2.15 U2.18 U5.2 U5.3 U5.4 U5.6 U5.8 U5.9 U5.10 U5.11 U5.22 U5.24 U5.25 U5.37 U5.38 U5.39 U5.40 U5.41 U5.42 U5.43 U5.50 U5.51 U5.54 U8.7 U8.8 U8.9 U8.10
copper on no net: | length 148.2
  Top Layer w10: 1385,995 1520,995
  Bottom Layer w10: 2750.08,1680 2752.58,1677.5 ; 2750.08,1730 2756.89,1736.81
  other v1: 810,1485

## Polygon pours and split planes (outlines as drawn)
GND on Top Layer "Top Layer-GND" (solid, pour order 12): 4.02,2467.98 5364.02,2467.98 5364.02,-2.02 4.02,-2.02
GND on Bottom Layer "Bottom Layer-GND" (solid, pour order 10): 0,2465 5360,2465 5360,-5 0,-5

## Keep-outs
Keep-Out Layer:
  circle w10: c110,2360 r110
  circle w10: c120,125 r110
  circle w10: c5245,120 r110
  circle w10: c5245,2350 r110

## Other copper
Bottom Layer:
  rectangle net +VIN_SW: 60,1590 265,1765
  rectangle net NetC5_1: 4715,1010 4995,1220
  rectangle net NetC5_2: 5030,1015 5240,1220

## Silkscreen, mask and mechanical layers (free items; w line width, h text height)
Top Overlay:
  circle w10: c4290,300 r200
  circle w10: c3240,300 r200
  circle w10: c2425,300 r200
  circle w10: c1500,300 r200
  lines w30: 4885,1805 4942.5,1805 5057.5,1805 5115,1805 ; 4900,380 5050,380 5107.5,380 5130,380 ; 4995,1690 4995,1747.5 4995,1862.5 4995,1920
  text "Current Limit" at 4805,2075 h40
  text "Voltage" at 4090,1685 h60
  text "-" at 3535,955 h3
  text "Current" at 4090,845 h60
  text "Mem2" at 2310,275 h60
  text "Mem1" at 3140,275 h60
  text "ON/OFF" at 1330,270 h60
  text "Output" at 4135,270 h60
Bottom Overlay:
  text "LPS_Display Board, Rev I, 2/22/2020" at 2905,2090 h50
  text "UART" at 2925,55 h60
Mechanical 1:
  lines w10: 0,0 0,2470 5365,2470 5365,0 0,0

## Text inside footprints (layer, text, board x,y; h text height)
CN1: Bottom Overlay "16" at 95,1365 h25 r90; Bottom Overlay "8" at 225,1360 h25 r90; Bottom Overlay "1" at 220,2215 h25 r90; Bottom Overlay "9" at 110,2220 h25 r90
CN4: Bottom Overlay "1" at 4700,1152 h25; Bottom Overlay "5" at 5278,1157 h25; Bottom Overlay "10" at 5300,1029 h25; Bottom Overlay "6" at 4699,1033 h25
P2: Bottom Overlay "1" at 596.93,2146.38 h25
U2: Top Overlay "Newhaven Display NHD-3.12-25664UCxx" at 913.27,1507.59 h39.37; Top Overlay "Top View" at 1625.87,1852.08 h39.37; Top Overlay "1" at 2783.74,2343.41 h39.37; Top Overlay "20" at 720,2405 h39.37